# Altium PCB HC32F005.PcbDoc
Units mm, origin at the board's own origin, x right, y up, seen from the top; angles counter-clockwise.
Board outline 40.01 x 40 mm, 2 copper layers (Top Layer, Bottom Layer); 28 components, 28 nets, 99 pads, 7 vias.
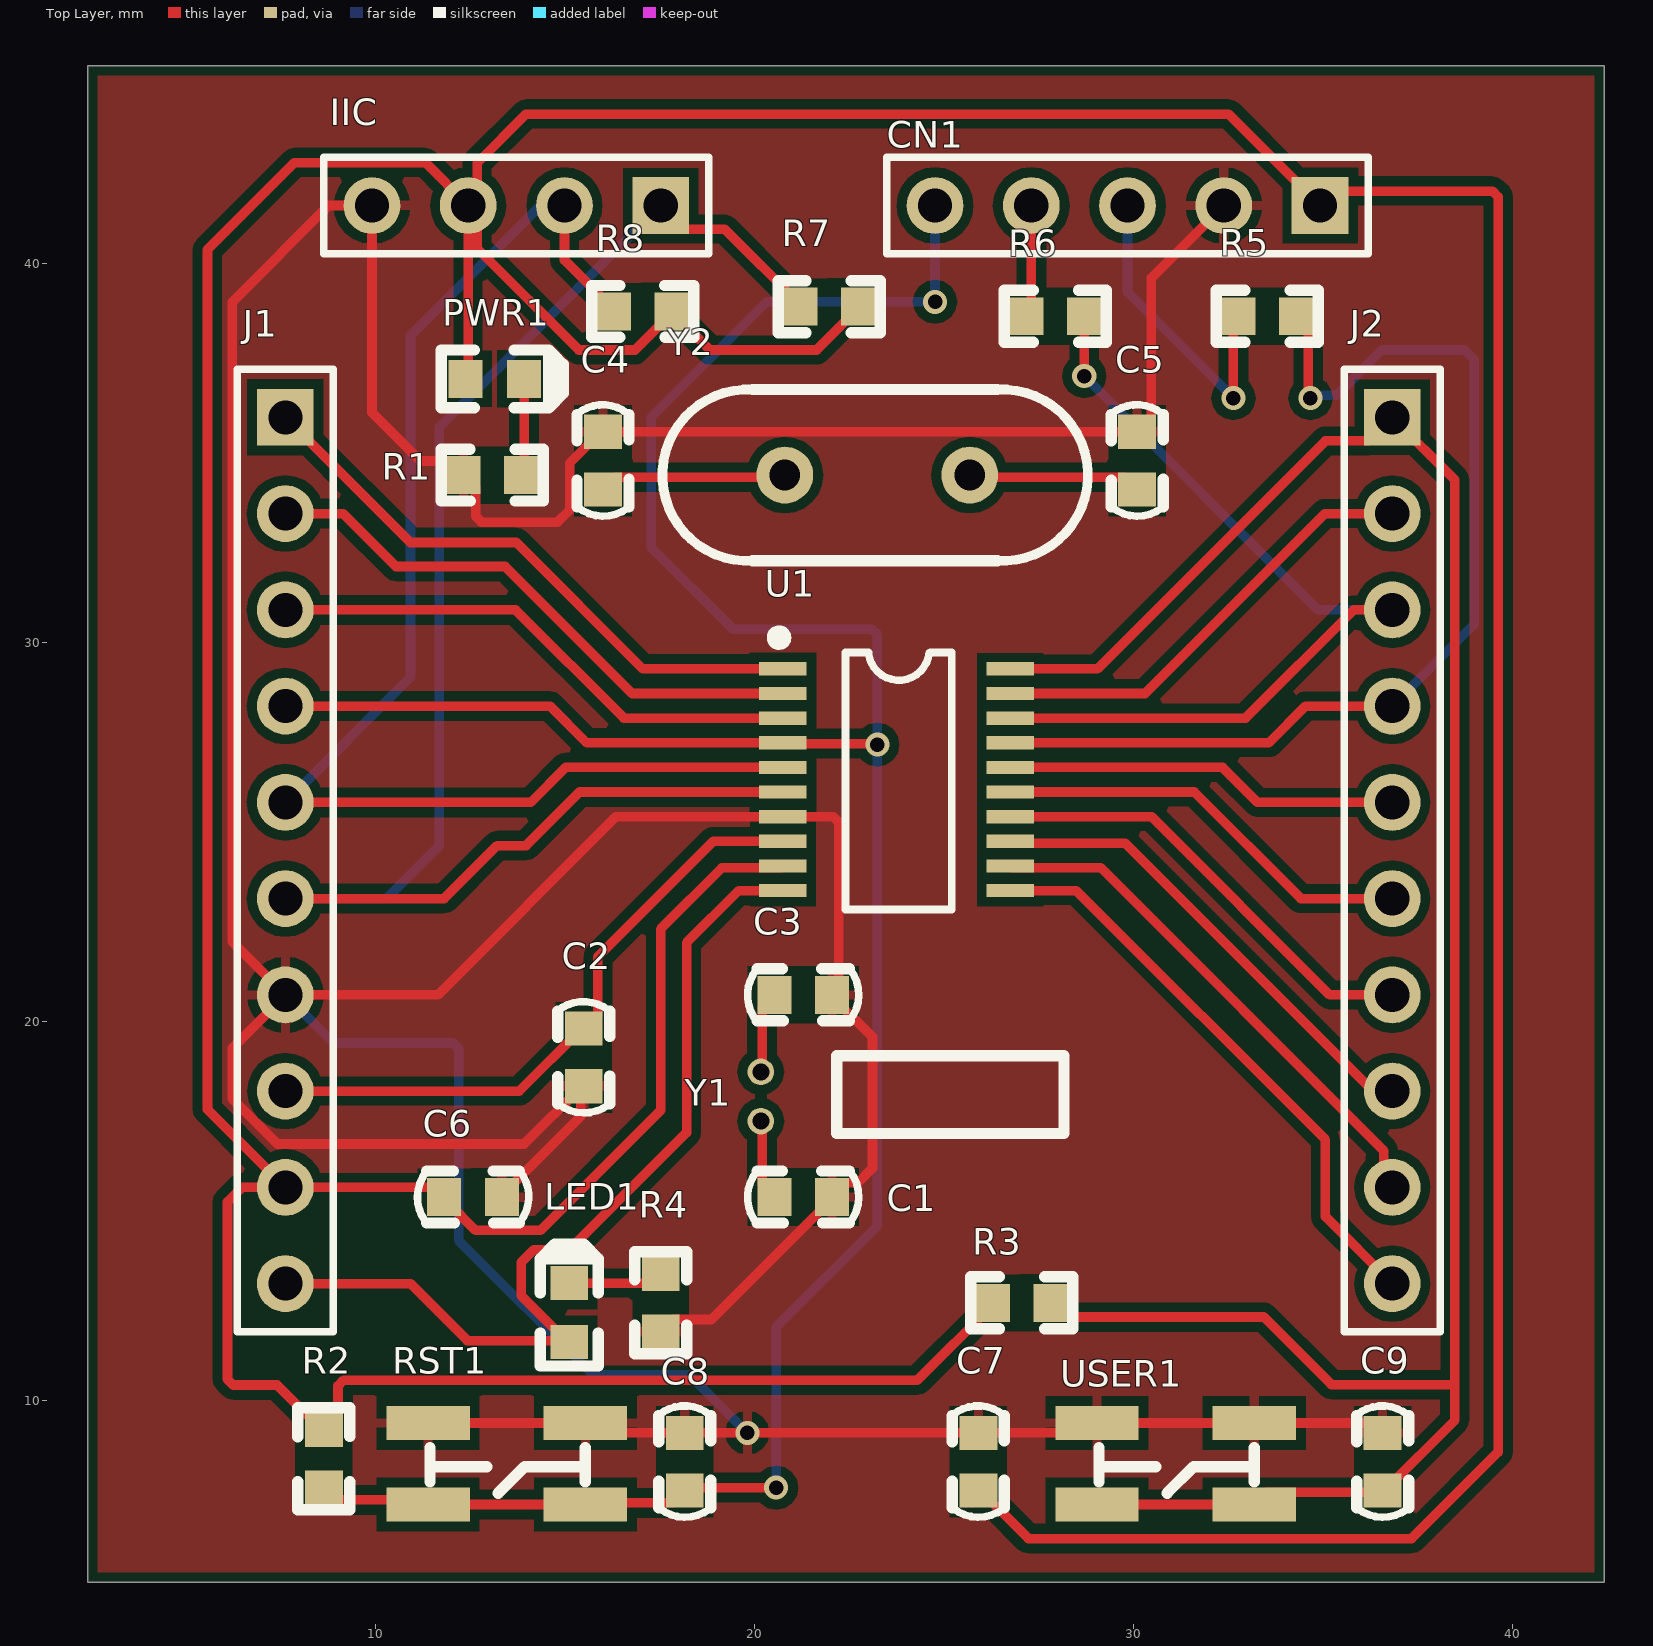
[diagram p0: Top Layer view]
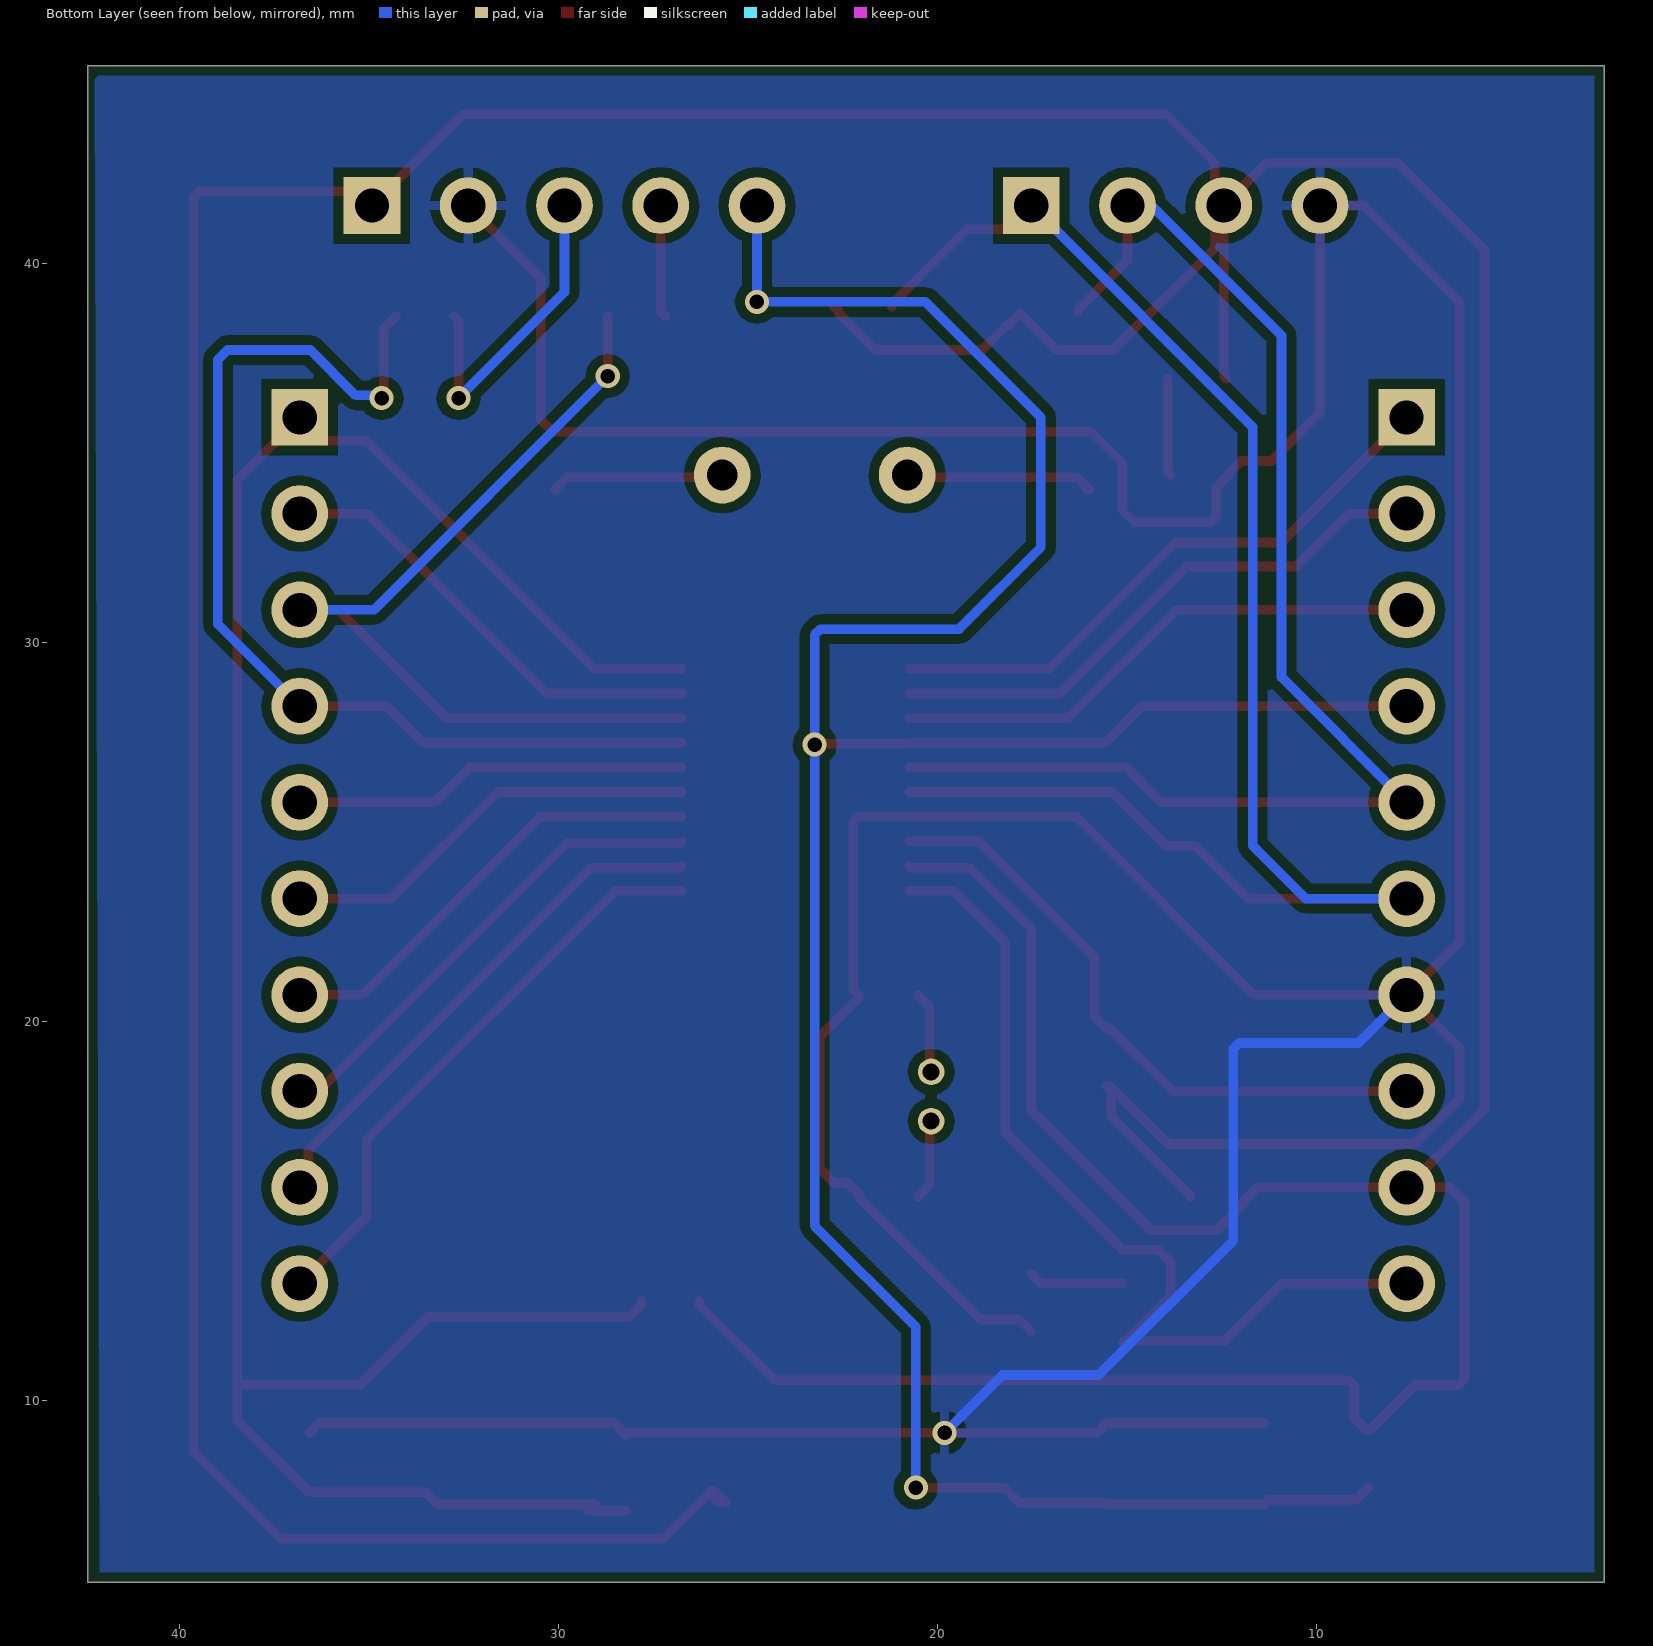
[diagram p1: Bottom Layer view, seen from below]
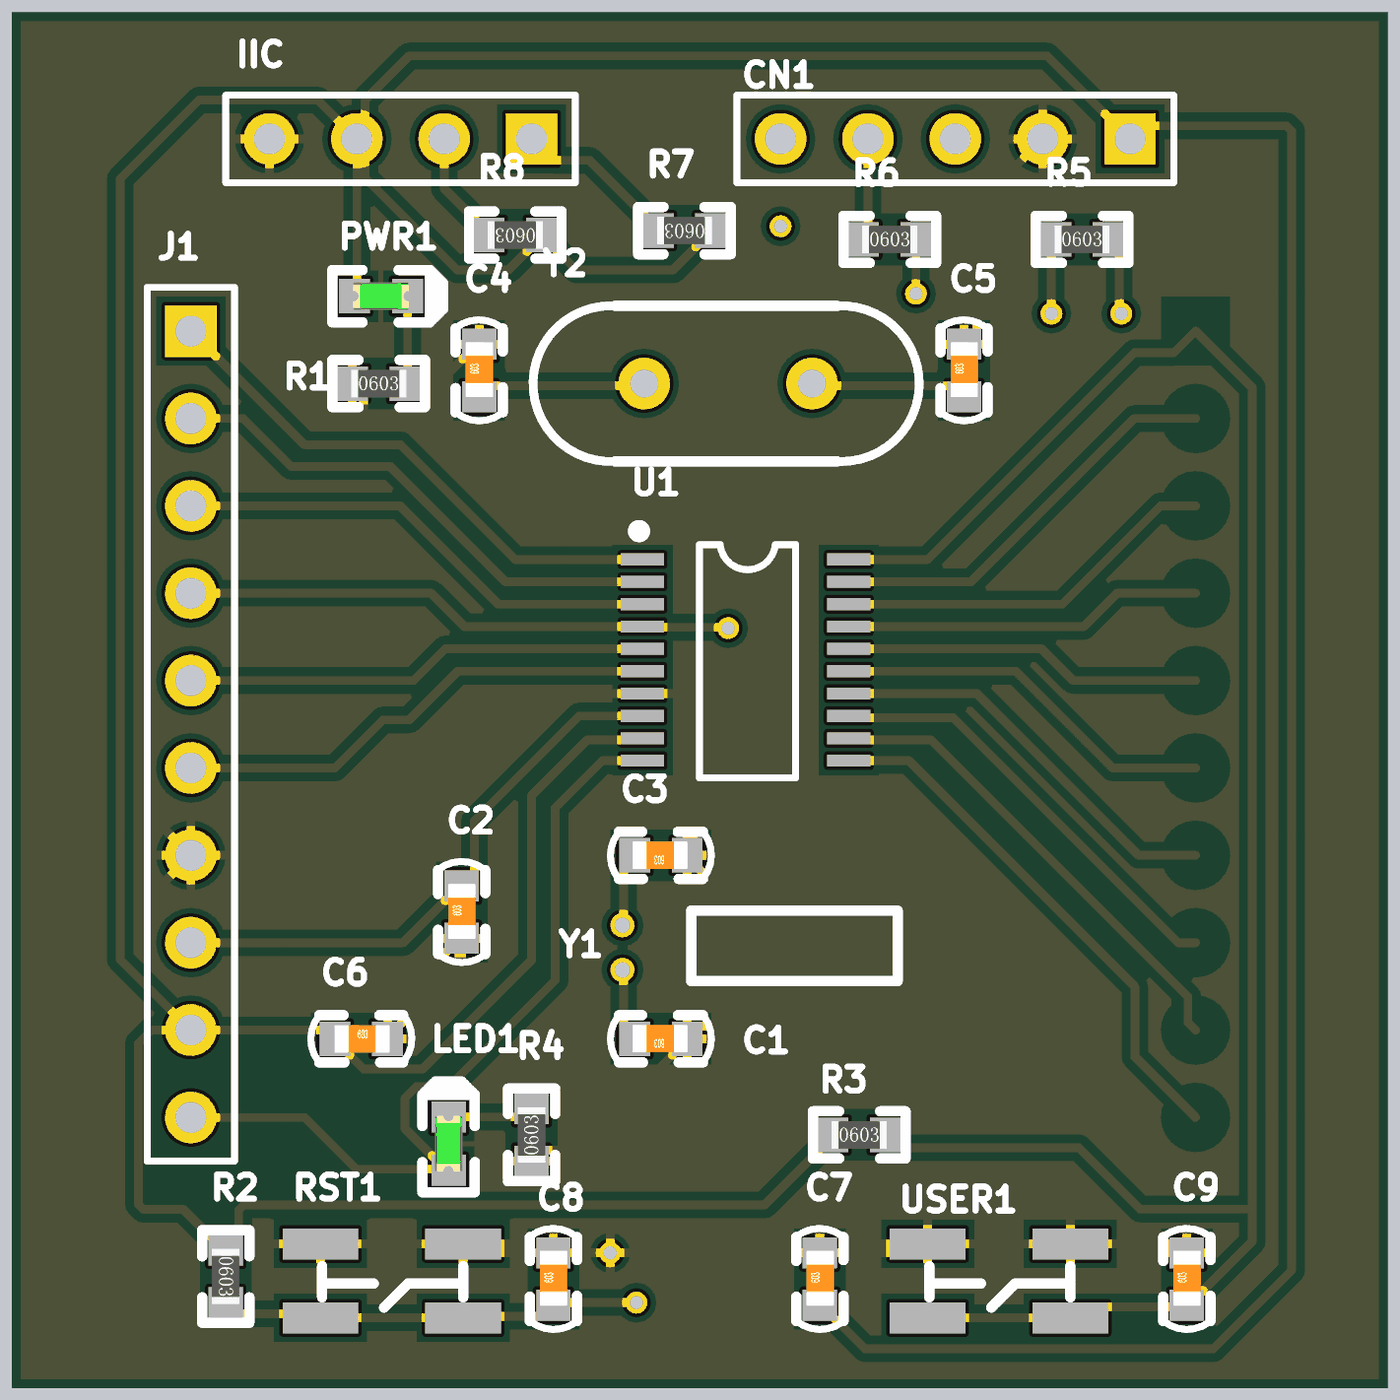
[diagram p2: 3D render of the assembled board from above, using the file's embedded part models]

## Layer stack, top to bottom
Top Solder: solder mask 0.0102, Solder Resist, Dk 3.5
Top Layer: signal copper 0.0356
Dielectric 1: dielectric 0.32, FR-4, Dk 4.8
Bottom Layer: signal copper 0.0356
Bottom Solder: solder mask 0.0102, Solder Resist, Dk 3.5

## Board outline
2.413,5.207 2.413,45.212 42.418,45.212 42.418,5.207

## Design rules (kind name [scope] priority, off if disabled: settings)
Clearance [All] p1: gap=0.254 ignorepadtopadclearanceinfootprint=FALSE except(0: Arc-Hole Track-Hole SMDPad-Hole THPad-Hole Via-Hole Fill-Hole Poly-Hole Region-Hole Text-Hole)
PolygonConnect [All] p1: connectstyle=Relief reliefconductorwidth=0.254 reliefentries=4 polygonreliefangle="90 Angle" airgapwidth=0.254
RoutingVias [All] p1: holewidth=0.381 width=0.635 viastyle="Through Hole" minholewidth=0.381 minwidth=0.635 maxholewidth=0.381 maxwidth=0.635
SolderMaskExpansion [All] p1: expansion=0.102
Width [All] p1: maxlimit=0.254 minlimit=0.254 preferedwidth=0.254
30 further rules are at their usual default settings.

## Components (designator, comment, footprint, x,y, rotation, side; value= is the part's Value field where it differs from the comment)
C1 "20pF" C0603 21.289,15.367 r180 top
C2 "4.7uF" C0603 15.494,19.05 r90 top
C3 "20pF" C0603 21.289,20.701 r180 top
C4 "20pF" C0603 16.002,34.798 r90 top
C5 "20pF" C0603 30.099,34.798 r90 top
C6 "0.1uF" C0603 12.573,15.367 r0 top
C7 "4.7uF" C0603 25.908,8.382 r90 top
C8 "0.1uF" C0603 18.161,8.382 r90 top
C9 "0.1uF" C0603 36.576,8.382 r90 top
CN1 "2.54mm,5Pin" HDR1X5 34.925,41.529 r180 top
IIC "IIC" HDR1X4 17.526,41.529 r180 top
J1 "head" HDR1*10 35.306,25.273 r270 top
J2 "head" HDR1*10 64.516,25.273 r270 top
LED1 "GREEN" LED0603 15.113,12.319 r270 top
PWR1 "RED" LED0603 13.147,36.957 r180 top
R1 "1k" R0603 13.081,34.417 r0 top
R2 "10k" R0603 8.636,8.458 r270 top
R3 "10k" R0603 27.051,12.573 r0 top
R4 "2k" R0603 17.526,12.573 r90 top
R5 "100R" R0603 33.528,38.608 r0 top
R6 "100R" R0603 27.94,38.608 r0 top
R7 "1k" R0603 21.971,38.862 r180 top
R8 "1k" R0603 17.052,38.735 r180 top
RST1 "K2-1808SN" PUSHBUTTON-4.2*3.25 13.462,8.328 r180 top
U1 "HC32F003_005_TSSOP20/SOP20" TSSOP-20 23.749,26.378 r270 top
USER1 "K2-1808SN" PUSHBUTTON-4.2*3.25 31.115,8.328 r180 top
Y1 "32.768KHz" 32.768K 20.168,18.669 r0 top
Y2 "8.0MHz" 49s 23.241,34.417 r180 top

## Footprints (in the part's own frame and the unit in brackets; to place one, negate y for a bottom-side part, rotate by r counter-clockwise, add the part's x,y. Pads: shape width x height; smd on the part's side, far side on the other; paste and mask are expansions set on the pad)
32.768K [mm]
  round 0.7 hole 0.45: 1(0,0) 2(0,-1.3)
  silkscreen extent 2,-1.62 8,0.42
49s [mm]
  round 1.5 hole 0.813: 1(-2.44,0) 2(2.44,0)
  silkscreen extent -5.55,-2.26 5.67,2.26
C0603 [mm]
  rect 0.9x1 smd: 1(-0.762,0) 2(0.762,0)
  silkscreen extent -1.47,-0.69 1.47,0.69, body extent -0.78,-0.41 0.82,0.39, height 0.3
HDR1*10 [mm]
  rect 1.5x1.5 hole 0.9: 1(-10.668,-27.686)
  round 1.5 hole 0.9: 2(-8.128,-27.686) 3(-5.588,-27.686) 4(-3.048,-27.686) 5(-0.508,-27.686) 6(2.032,-27.686) 7(4.572,-27.686) 8(7.112,-27.686) 9(9.652,-27.686) 10(12.192,-27.686)
  silkscreen extent -11.94,-28.96 13.46,-26.42
HDR1X4 [mm] "Connector; Header; 4 Position"
  rect 1.5x1.5 hole 0.9: 1(0,0)
  round 1.5 hole 0.9: 2(2.54,0) 3(5.08,0) 4(7.62,0)
  silkscreen extent -1.27,-1.27 8.89,1.27
HDR1X5 [mm]
  rect 1.5x1.5 hole 0.9: 1(0,0)
  round 1.5 hole 0.9: 2(2.54,0) 3(5.08,0) 4(7.62,0) 5(10.16,0)
  silkscreen extent -1.27,-1.27 11.43,1.27
LED0603 [mm]
  rect 0.9x1 smd: 1(0.775,0) 2(-0.775,0)
  silkscreen extent -1.8,-0.76 1.41,0.76, body extent -0.81,-0.4 0.81,0.4, height 0.6
PUSHBUTTON-4.2*3.25 [mm]
  rect 2.2x0.9 smd: 1(-2.075,1.075) 2(2.075,-1.075) 3(2.075,1.075) 4(-2.075,-1.075)
  silkscreen extent -2.07,-0.42 2.03,0.78
R0603 [mm]
  rect 0.9x1 smd: 1(-0.762,0) 2(0.762,0)
  silkscreen extent -1.35,-0.69 1.35,0.69, body extent -0.8,-0.4 0.8,0.4, height 0.45
TSSOP-20 [mm] "TSSOP-16"
  rect 0.35x1.25 smd: 1(-2.925,-3) 2(-2.275,-3) 3(-1.625,-3) 4(-0.975,-3) 5(-0.325,-3) 6(0.325,-3) 7(0.975,-3) 8(1.625,-3) 9(2.275,-3) 10(2.925,-3) 11(2.925,3) 12(2.275,3) 13(1.625,3) 14(0.975,3) 15(0.325,3) 16(-0.325,3) 17(-0.975,3) 18(-1.625,3) 19(-2.275,3) 20(-2.925,3)
  silkscreen extent -3.97,-3.32 3.42,1.45

## Part data
C1 C3 C4 C5: library part "C_no pol", "Capacitor without polarity"
C2: library part CAP-CC(SMD), "Capacitor"
C6 C7 C8 C9: library part CAP-CC(SMD), "Ceramic Capacitor,0603"
CN1: library part "Header 5", "Header, 5-Pin", LatestRevisionDate=17-Jul-2002, LatestRevisionNote="Re-released for DXP Platform.", Publisher="Altium Limited"
J1 J2: library part Component_1
LED1 PWR1: library part LED
R1 R2 R3 R4 R5 R6 R7 R8: library part RES, "Resister,0603,5%"
RST1 USER1: library part Button-SMD-6*6, "SMD button"
Y1: library part Crystal_1, "4.0000MHz"
Y2: library part Crystal, "4.0000MHz"

## Via types
v1: diameter 0.635, hole 0.381, Top Layer to Bottom Layer, 7 vias

## Nets (pads, with @x,y where several pads share a name; then routed paths per layer and width w, separated by ;. In a path a pad name is that pad's centre, name@x,y a point inside that pad or via, vN(x,y) a via of type N, cw(c..) or ccw(c..) an arc to the next point about the centre after c; other vN are vias at no path point)
DVDD: C6.1 C7.1 CN1.1 IIC.3 J1.9 PWR1.1 R2.1 R3.1 R7.1 R8.1 U1.9 | length 180.7
  Top Layer w0.254: PWR1.1 12.446,37.03 IIC.3 ; U1.9 20.701,24.055 19.144,24.055 17.526,22.437 17.526,17.653 14.359,14.486 12.642,14.486 11.938,15.19 11.938,15.24 C6.1 11.557,15.621 J1.9 ; R7.1 22.606,38.735 22.606,38.685 21.64,37.719 18.83,37.719 18.187,38.362 18.137,38.362 17.814,38.685 16.848,37.719 15.367,37.719 12.684,40.402 12.684,41.291 IIC.3 ; C7.1@25.585,7.297 C7.1 25.958,7.62 27.228,6.35 37.338,6.35 39.624,8.636 39.624,41.761 39.475,41.91 35.306,41.91 CN1.1 32.512,43.942 13.97,43.942 12.684,42.656 12.684,41.767 IIC.3 ; C7.1@25.743,7.297 C7.1@25.987,7.541 ; R3.1@26.289,12.623 R3.1 26.289,12.523 24.299,10.533 9.158,10.533 9.009,10.384 9.009,9.543 8.686,9.22 R2.1 8.586,9.22 7.399,10.407 6.245,10.407 6.096,10.556 6.096,15.24 6.477,15.621 J1.9 ; J1.9 5.566,17.675 5.566,40.364 7.862,42.66 11.315,42.66 IIC.3
GND: C1.1 C2.1 C3.1 C4.2 C5.2 C6.2 C7.2 C8.2 C9.2 CN1.2 IIC.4 J1.7 R1.1 R4.1 RST1.2 RST1.4 U1.7 USER1.2 USER1.4 | length 156.4
  Top Layer w0.254: RST1.2 RST1.4 15.796,9.144 C8.2 v1(19.812,9.144) C7.2 USER1.2@28.277,9.144 ; C6.2 13.335,15.417 15.412,17.494 15.412,18.206 C2.1 ; C2.1@15.544,18.288 C2.1 ; R4.1 17.849,12.134 18.868,12.134 22.051,15.317 C1.1 22.051,15.417 22.374,15.74 22.725,15.74 23.114,16.129 23.114,19.588 22.051,20.651 22.225,20.825 22.225,25.251 22.073,25.403 U1.7 16.346,25.403 11.644,20.701 J1.7 ; USER1.2@28.213,9.08 USER1.2@28.277,9.144 ; CN1.2 30.472,39.616 30.472,35.883 30.149,35.56 C5.2 C4.2 15.952,35.56 15.121,34.729 15.121,33.489 14.808,33.176 12.798,33.176 12.642,33.332 12.642,34.094 R1.1 12.319,34.467 11.996,34.79 11.184,34.79 9.906,36.068 IIC.4 8.763,41.529 6.223,38.989 6.223,22.098 J1.7 ; C9.2 36.317,9.403 USER1.4 USER1.2 28.536,9.403 USER1.2@28.277,9.144 ; J1.7 6.223,19.304 6.223,17.959 7.418,16.764 13.92,16.764 15.444,18.288 C2.1
  Bottom Layer w0.254: J1.7 8.89,19.431 12.043,19.431 12.192,19.282 12.192,14.224 15.748,10.668 18.288,10.668 v1(19.812,9.144)
NetC1_2: C1.2 Y1.2 | length 2.2
  Top Layer w0.254: Y1.2 20.204,17.333 20.204,15.69 C1.2
NetC3_2: C3.2 Y1.1 | length 2.2
  Top Layer w0.254: Y1.1 20.204,18.705 20.204,20.378 C3.2
NetC4_1: C4.1 Y2.2 | length 5
  Top Layer w0.254: C4.1@16.052,34.036 C4.1 16.325,34.359 20.743,34.359 Y2.2
NetC5_1: C5.1 Y2.1 | length 4.6
  Top Layer w0.254: Y2.1 25.739,34.359 29.776,34.359 C5.1
NetCN1_3: CN1.3 R5.1 | length 8.4
  Top Layer w0.254: v1(32.639,36.449) 32.639,38.481 R5.1
  Bottom Layer w0.254: CN1.3 29.845,39.243 v1(32.639,36.449)
NetCN1_4: CN1.4 R6.1 | length 3
  Top Layer w0.254: R6.1 27.305,38.735 CN1.4
NetLED1_2: LED1.2 R4.2 | length 2.5
  Top Layer w0.254: LED1.2 17.285,13.094 R4.2
NetPWR1_2: PWR1.2 R1.2 | length 2.6
  Top Layer w0.254: R1.2 13.922,34.496 PWR1.2
P00: C8.1 CN1.5 J1.4 R2.2 RST1.1 RST1.3 U1.4 | length 73.6
  Top Layer w0.254: J1.4 14.605,28.321 15.573,27.353 U1.4 20.773,27.329 23.217,27.329 v1(23.241,27.305) ; R2.2 8.959,7.373 11.267,7.373 RST1.3 RST1.1 15.581,7.297 17.838,7.297 C8.1 18.237,7.696 v1(20.574,7.696)
  Bottom Layer w0.254: v1(20.574,7.696) 20.574,11.938 23.241,14.605 v1(23.241,27.305) 23.241,30.204 23.092,30.353 19.431,30.353 17.272,32.512 17.272,35.941 20.32,38.989 v1(24.765,38.989) CN1.5
P01: IIC.2 J1.5 R8.2 U1.5 | length 36
  Top Layer w0.254: J1.5 14.097,25.781 15.019,26.703 U1.5 ; IIC.2 14.986,40.089 16.29,38.785 R8.2
  Bottom Layer w0.254: J1.5 10.922,29.083 10.922,38.1 14.351,41.529 IIC.2
P02: IIC.1 J1.6 R7.2 U1.6 | length 43.1
  Top Layer w0.254: J1.6 11.811,23.241 13.208,24.638 13.97,24.638 15.385,26.053 U1.6 ; IIC.1 18.149,40.906 19.215,40.906 21.209,38.912 R7.2
  Bottom Layer w0.254: J1.6 10.287,23.241 11.684,24.638 11.684,35.687 IIC.1
P03: J1.10 LED1.1 U1.10 | length 24.6
  Top Layer w0.254: J1.10@7.624,13.085 J1.10 10.922,13.081 12.427,11.576 LED1.1@15.031,11.576 ; LED1.1 15.081,11.576 LED1.1@15.031,11.576 ; U1.10 19.585,23.453 18.211,22.079 18.211,17.068 15.121,13.978 14.182,13.978 13.843,13.639 13.843,12.764 LED1.1@15.031,11.576
P14: J2.9 U1.12 | length 14
  Top Layer w0.254: U1.12 26.797,24.055 29.14,24.055 36.609,16.586 36.609,15.842 J2.9
P15: J2.10 U1.11 | length 15.6
  Top Layer w0.254: U1.11 28.49,23.453 35.064,16.879 35.064,14.847 J2.10
P23: J2.8 U1.13 | length 12.8
  Top Layer w0.254: U1.13 26.797,24.705 29.778,24.705 36.322,18.161 J2.8
P24: J2.7 U1.14 | length 12
  Top Layer w0.254: U1.14 30.477,25.403 35.179,20.701 J2.7
P25: J2.6 U1.15 | length 11.2
  Top Layer w0.254: U1.15 31.605,26.053 34.417,23.241 J2.6
P26: J2.5 U1.16 | length 10.5
  Top Layer w0.254: U1.16 32.352,26.703 33.274,25.781 J2.5
P27: J2.4 R5.2 U1.17 | length 27.8
  Top Layer w0.254: U1.17 33.576,27.353 34.544,28.321 J2.4 ; R5.2 34.613,38.285 34.613,36.507 v1(34.671,36.449)
  Bottom Layer w0.254: v1(34.671,36.449) 34.744,36.522 35.355,36.522 36.552,37.719 38.735,37.719 38.989,37.465 38.989,30.48 J2.4
P31: J2.3 R6.2 U1.18 | length 23.5
  Top Layer w0.254: U1.18 32.956,28.003 35.814,30.861 J2.3 ; v1(28.702,37.03) R6.2
  Bottom Layer w0.254: v1(28.702,37.03) 34.871,30.861 J2.3
P32: J2.2 U1.19 | length 12
  Top Layer w0.254: U1.19 30.304,28.653 35.052,33.401 J2.2
P33: C9.1 J2.1 R3.2 U1.20 USER1.1 USER1.3 | length 63.2
  Top Layer w0.254: U1.20 29.049,29.303 35.064,35.318 36.207,35.318 J2.1 38.481,34.29 38.481,10.414 ; R3.2@27.813,12.623 R3.2 27.813,12.523 28.136,12.2 33.441,12.2 35.227,10.414 38.481,10.414 ; USER1.3@28.22,7.083 29.21,7.083 USER1.3 USER1.1 33.513,7.576 36.532,7.576 C9.1 36.626,7.62 38.481,9.475 38.481,10.414
P34: J1.1 U1.1 | length 15.9
  Top Layer w0.254: J1.1 10.922,32.639 13.716,32.639 17.052,29.303 U1.1
P35: J1.2 U1.2 | length 15.1
  Top Layer w0.254: J1.2 9.144,33.401 10.541,32.004 13.422,32.004 16.773,28.653 U1.2
P36: J1.3 U1.3 | length 14.3
  Top Layer w0.254: J1.3 13.696,30.861 16.554,28.003 U1.3
VCAP: C2.2 J1.8 U1.8 | length 16.8
  Top Layer w0.254: J1.8 13.793,18.161 15.444,19.812 C2.2 15.544,19.812 15.867,20.135 15.867,21.709 18.911,24.753 U1.8

## Polygon pours and split planes (outlines as drawn)
GND on Bottom Layer (solid, remove dead copper, pour order 0): 2.667,44.958 42.241,44.958 42.114,5.461 2.667,5.461
GND on Top Layer (solid, remove dead copper, pour order 2): 2.667,44.958 42.164,44.958 42.164,5.461 2.667,5.461

## Silkscreen, mask and mechanical layers (free items; w line width, h text height)
Mechanical 1:
  the board outline again, w0.381